# EAGLE board with_solar (EAGLE 9.4.2)
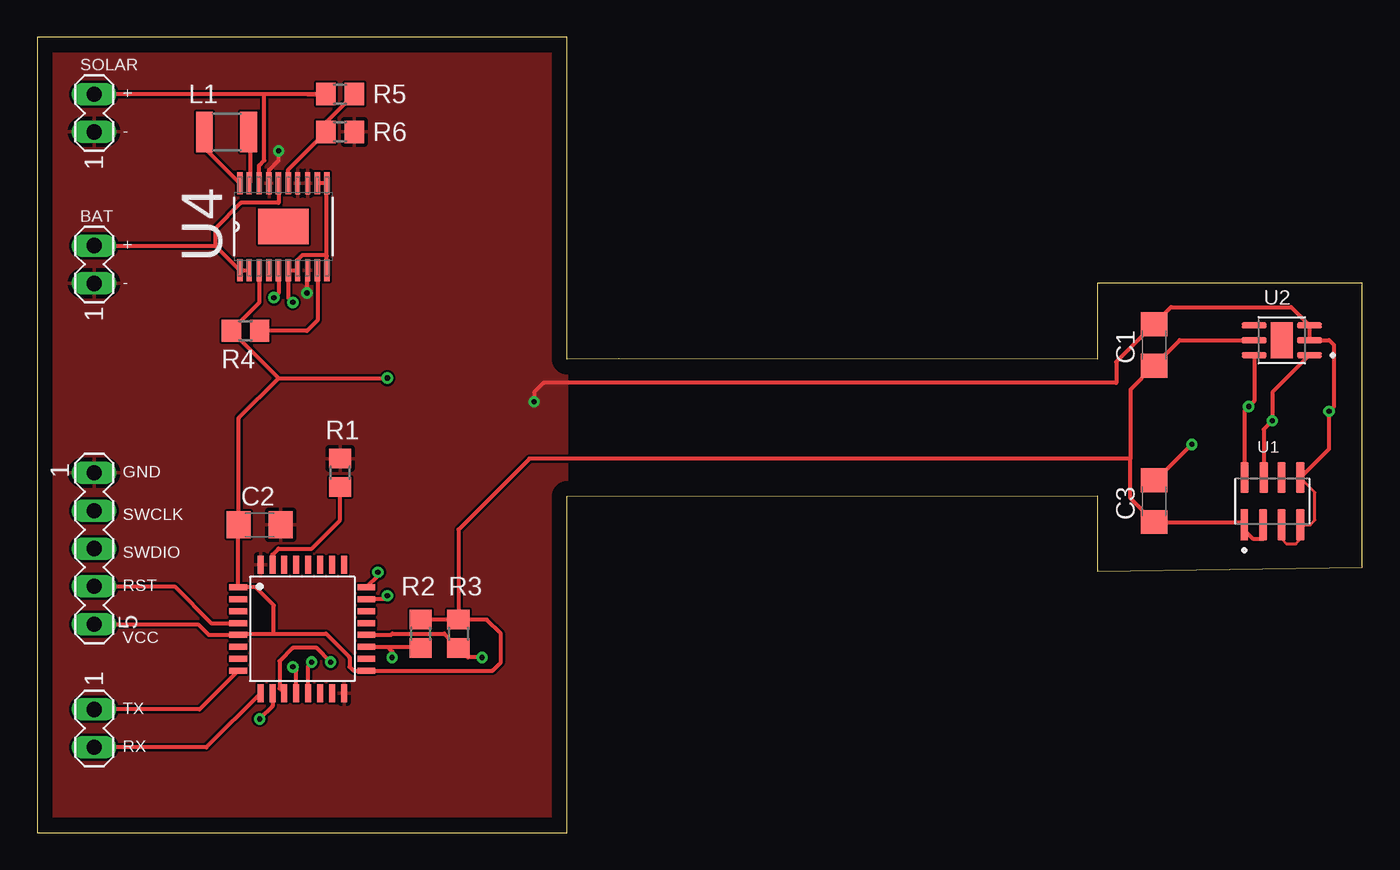
[diagram p0: board, top side]
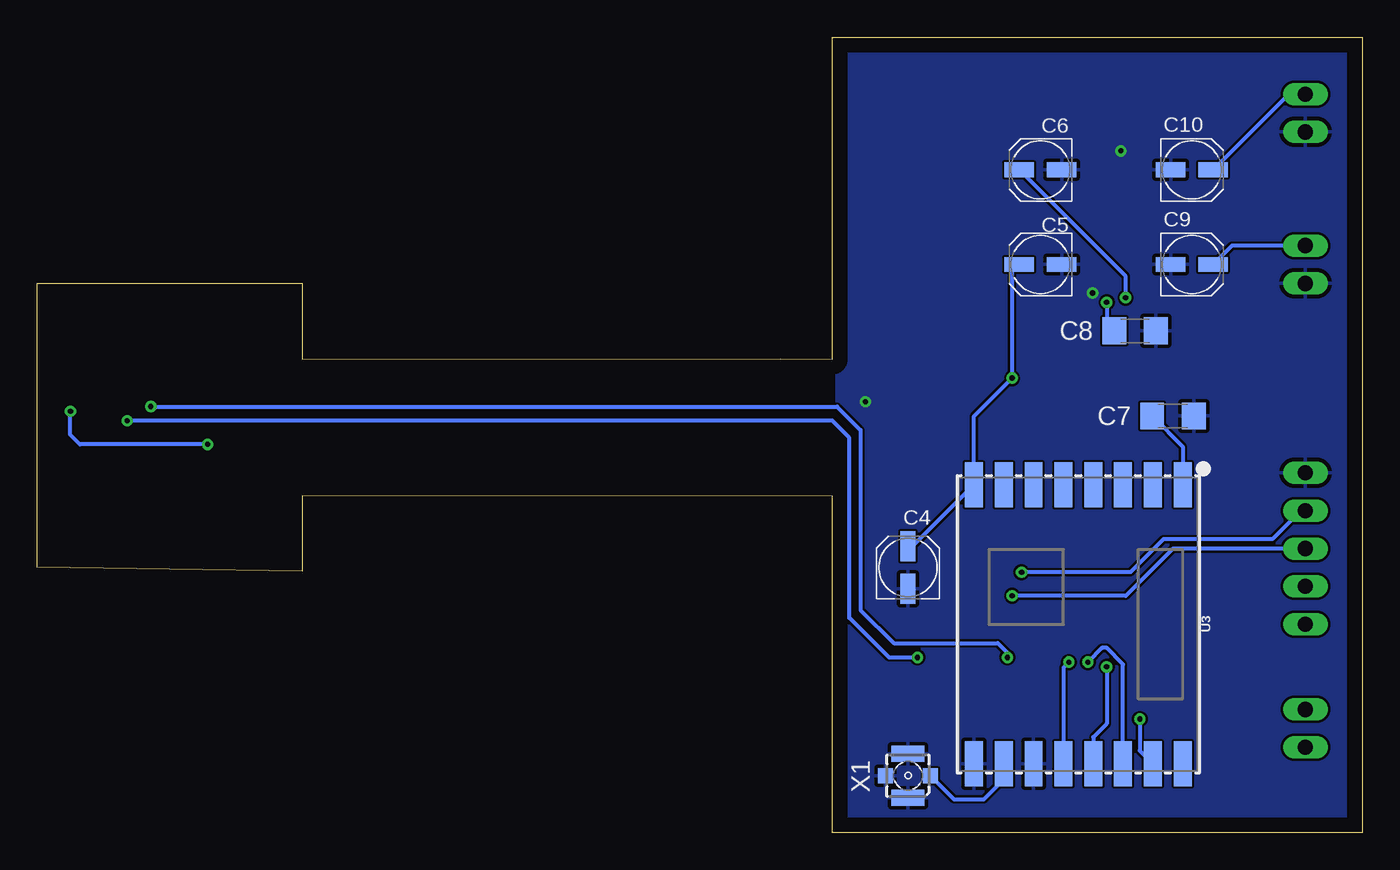
[diagram p1: board, bottom side, seen from below]

Size 88.9 x 53.34 mm. Coordinates in mm from the lower left corner, seen from the top.
Outline: 0,0 35.56,0 35.56,22.54 71.12,22.61 71.12,17.53 88.9,17.78 88.9,36.83 71.12,36.83 71.12,31.75 39.03,31.77 35.56,31.75 35.56,53.34 0,53.34 0,0
Copper layers (1*16): Top 0.035mm / dielectric 1.5mm / Bottom 0.035mm
Design rules "default": minimum track width 6mil, minimum drill 0.35mm, track to track 6mil, track to pad 6mil, pad to pad 6mil, via to via 6mil, smd to smd 6mil, copper to edge 40mil, drill to drill 6mil, minimum pad ring 10mil, minimum via ring 8mil, stop-mask expansion 4mil, vias tented up to drill 0mil, thermal gap 10mil

## Footprints (pad centres in the part's own frame; a part is rotated, then mirrored left to right if it is on the bottom)
C1206 = smd 1.6 x 1.8: 1 -1.4,0; 2 1.4,0
UD-4X5,8_NICHICON = smd 2 x 1: + 1.425,0; - -1.425,0
R1210 = smd 1.12 x 2.7: 1 -1.49,0; 2 1.49,0
R0805 = smd 1.3 x 1.5: 1 -0.95,0; 2 0.95,0
LQFP32-7X7 = smd 1.2 x 0.4: 1 -4.3,2.8; 2 -4.3,2; 3 -4.3,1.2; 4 -4.3,0.4; 5 -4.3,-0.4; 6 -4.3,-1.2; 7 -4.3,-2; 8 -4.3,-2.8; 17 4.3,-2.8; 18 4.3,-2; 19 4.3,-1.2; 20 4.3,-0.4; 21 4.3,0.4; 22 4.3,1.2; 23 4.3,2; 24 4.3,2.8 | smd 0.4 x 1.2: 9 -2.8,-4.3; 10 -2,-4.3; 11 -1.2,-4.3; 12 -0.4,-4.3; 13 0.4,-4.3; 14 1.2,-4.3; 15 2,-4.3; 16 2.8,-4.3; 25 2.8,4.3; 26 2,4.3; 27 1.2,4.3; 28 0.4,4.3; 29 -0.4,4.3; 30 -1.2,4.3; 31 -2,4.3; 32 -2.8,4.3
MA05-1 = drill 1.016 long: 1 -5.08,0; 2 -2.54,0; 3 0,0; 4 2.54,0; 5 5.08,0
MA02-1 = drill 1.016 long: 1 -2.54,0; 2 0,0
SON125P300X500X100-8N = smd 2.072 x 0.53: 1 -1.581,1.875; 2 -1.581,0.625; 3 -1.581,-0.625; 4 -1.581,-1.875; 5 1.581,-1.875; 6 1.581,-0.625; 7 1.581,0.574; 8 1.581,1.875
SON100P300X300X80-7N = smd 1.698 x 0.42: 1 -1.854,1; 2 -1.854,0; 3 -1.854,-1; 4 1.854,-1; 5 1.854,0; 6 1.854,1 | smd 1.5 x 2.4: 7 0,0
RFM69W-XXXS2 = smd 3 x 1.2: 1 -9.35,7; 2 -9.35,5; 3 -9.35,3; 4 -9.35,1; 5 -9.35,-1; 6 -9.35,-3; 7 -9.35,-5; 8 -9.35,-7; 9 9.35,-7; 10 9.35,-5; 11 9.35,-3; 12 9.35,-1; 13 9.35,1; 14 9.35,3; 15 9.35,5; 16 9.35,7
LTC3106 = smd 1.473 x 0.356: 1 -2.921,2.921; 2 -2.921,2.286; 3 -2.921,1.626; 4 -2.921,0.965; 5 -2.921,0.33; 6 -2.921,-0.33; 7 -2.921,-0.965; 8 -2.921,-1.626; 9 -2.921,-2.286; 10 -2.921,-2.921; 11 2.921,-2.921; 12 2.921,-2.286; 13 2.921,-1.626; 14 2.921,-0.965; 15 2.921,-0.33; 16 2.921,0.33; 17 2.921,0.965; 18 2.921,1.626; 19 2.921,2.286; 20 2.921,2.921 | smd 2.388 x 3.404: 21 0,0
734120110 = smd 1 x 1: 1 0,-1.5; S@1 0,1.5 | smd 1.05 x 2.2: S@2 -1.475,0; S@3 1.475,0

## Placement (x,y rotation side)
C1  100n  [C1206]  74.93,32.7 90 top
C2  100n  [C1206]  14.92,20.64 0 top
C3  100n  [C1206]  74.93,22.23 90 top
C4  10u  [UD-4X5,8_NICHICON]  30.48,17.78 90 bottom
C5  47u  [UD-4X5,8_NICHICON]  21.59,38.1 180 bottom
C6  2,2u  [UD-4X5,8_NICHICON]  21.59,44.45 180 bottom
C7  100n  [C1206]  12.7,27.94 0 bottom
C8  100n  [C1206]  15.24,33.66 0 bottom
C9  47u  [UD-4X5,8_NICHICON]  11.43,38.1 0 bottom
C10  47u  [UD-4X5,8_NICHICON]  11.43,44.45 0 bottom
L1  10u  [R1210]  12.7,46.99 0 top
R1  10k  [R0805]  20.32,24.13 90 top
R2  10k  [R0805]  25.72,13.34 90 top
R3  10k  [R0805]  28.26,13.34 90 top
R4  1M  [R0805]  13.97,33.66 180 top
R5  2M  [R0805]  20.32,49.53 180 top
R6  365k  [R0805]  20.32,46.99 180 top
STM32L031K6_1  STM32L031K6  [LQFP32-7X7]  17.78,13.65 0 top
SV1  PROG  [MA05-1]  3.81,19.05 270 top
SV2  BAT  [MA02-1]  3.81,49.53 90 top
SV3  UART  [MA02-1]  3.81,5.71 270 top
SV4  SOLAR  [MA02-1]  3.81,39.37 90 top
U1  MS560702BA03-50  [SON125P300X500X100-8N]  82.87,22.23 90 top
U2  HDC2080DMBR  [SON100P300X300X80-7N]  83.5,33.02 180 top
U3  RFM69HW  [RFM69W-XXXS2]  19.05,13.97 270 bottom
U4  LTC3106  [LTC3106]  16.51,40.64 90 top
X1  734120110  [734120110]  30.48,3.81 90 bottom

## Library data of the parts
C1-C10 = rcl; SPICEPREFIX: C
L1 STM32L031K6_1 SV2-SV4 = dp
R1-R6 = rcl; SPICEPREFIX: R
SV1 = con-lstb; OC_FARNELL: unknown; OC_NEWARK: unknown
U1 = MS560702BA03-50; AVAILABILITY: Unavailable; COMMENT: MS560702BA03-50; DESCRIPTION: MS5607-02BA03 Series 3 V 1 to 120 kPa Absolute Barometric Pressure Sensor; EU_ROHS_COMPLIANCE: Compliant; MF: TE Connectivity; MP: MS560702BA03-50; PACKAGE: SMD-8 TE Connectivity; PRICE: None; TE_PURCHASE_URL: https://www.te.com/usa-en/product-MS560702BA03-50.html?te_bu=Cor&te_type=disp&te_campaign=seda_glo_cor-seda-global-disp-prtnr-fy19-seda-model-bom-cta_sma-317_1&elqCampaignId=32493
U2 = HDC2080DMBR2; AVAILABILITY: Unavailable; DESCRIPTION: Board Mount Humidity Sensors Low Power Humidity and Temperature Digital Sensor 6-WSON -40 to 85.; MF: Texas Instruments; MP: HDC2080DMBR; PACKAGE: WDFN-6 Texas Instruments; PRICE: None
U3 = SparkFun-RF
U4 = LTC3106
X1 = con-coax

## Nets
BAT_IN: C9.+ SV4.2 U4.1 U4.2 U4.16
GND: C1.2 C2.2 C3.2 C4.- C5.- C6.- C7.2 C8.2 C9.- C10.- R1.2 R6.1 STM32L031K6_1.16 STM32L031K6_1.32 SV1.1 SV2.1 SV4.1 U1.3 U1.4 U1.5 U2.2 U2.3 U3.9 U3.11 U4.8 U4.13 U4.14 U4.17 X1.S@1 X1.S@2 X1.S@3
I2C_SCL: R2.1 STM32L031K6_1.19 U1.8 U2.6
I2C_SDA: R3.1 STM32L031K6_1.20 U1.7 U2.1
N$1: R1.1 STM32L031K6_1.31
N$2: U3.10 X1.1
N$3: L1.1 U4.20
N$4: L1.2 U4.19
N$5: C6.+ U4.5
N$6: R4.1 U4.9
N$7: R5.1 R6.2 U4.15
N$10: C7.1 U3.1
NRST: STM32L031K6_1.4 SV1.4
PWR_VCC: C8.1 U4.6 U4.7 U4.10 U4.11 U4.12
SOLAR_IN: C10.+ R5.2 SV2.2 U4.18
SPI_MISO: STM32L031K6_1.12 U3.13
SPI_MOSI: STM32L031K6_1.13 U3.14
SPI_NSS: STM32L031K6_1.10 U3.15
SPI_SCK: STM32L031K6_1.11 U3.12
SWCLK: STM32L031K6_1.24 SV1.2
SWDIO: STM32L031K6_1.23 SV1.3
UART_RX: STM32L031K6_1.9 SV3.2
UART_TX: STM32L031K6_1.8 SV3.1
VCC: C1.1 C2.1 C3.1 C4.+ C5.+ R2.2 R3.2 R4.2 STM32L031K6_1.1 STM32L031K6_1.5 STM32L031K6_1.17 SV1.5 U1.1 U1.2 U2.5 U3.8 U4.3

## Tracks (layer width: path | path; a pad name or v marks a point on that pad's centre or on a via)
BAT_IN
  Top 0.254: U4.16 16.19,43.55 16.19,42.23 13.65,42.23 11.94,40.51 11.94,39.37 | SV4.2 11.94,39.37 | 11.94,39.37 U4.1 U4.2
  Bottom 0.254: SV4.2 8.73,39.37 C9.+
GND  (via drill 0.35)
  Top 0.203: U1.3 83.49,19.7 83.82,19.37 84.45,19.37 84.74,19.66 U1.4 85.41,20.64 85.72,20.95 85.72,22.82 U1.5
  Top 0.254: v18.1,36.2 18.1,37.68 U4.8 | U4.17 15.54,44.44 16.19,45.09 v16.19,45.72 | U1.5 86.68,25.74 v86.68,28.26 87,28.57 87,32.7 86.68,33.02 U2.2 U2.3 84.14,35.24 76.07,35.24 C1.2 72.39,31.56 72.39,30.16 33.97,30.16 33.34,29.53 v33.34,28.89 | C3.2 75.06,23.62 v77.47,26.04
  Bottom 0.254: v77.47,26.04 86.04,26.04 86.68,26.67 v86.68,28.26
  pour Top: 0.32,53.02 0.32,0 35.56,0 35.56,53.02
  pour Bottom: 0.32,53.34 0.32,0 35.24,0 35.24,53.34
I2C_SCL  (via drill 0.35)
  Top 0.254: 81.63,32 U2.6 81.65,28.94 v81.28,28.57 80.99,28.29 U1.8 | STM32L031K6_1.19 23.5,12.45 | 23.5,12.45 25.65,12.45 R2.1 | v23.81,11.75 23.81,12.13 23.5,12.45
  Bottom 0.254: v23.81,11.75 23.81,12.06 24.45,12.7 31.43,12.7 33.66,14.92 33.66,26.99 35.24,28.57 v81.28,28.57
I2C_SDA  (via drill 0.35)
  Top 0.254: STM32L031K6_1.20 23.73,13.25 23.81,13.34 27.31,13.34 R3.1 28.89,11.75 v29.84,11.75 | U2.1 82.87,29.53 v82.87,27.62 82.29,27.05 U1.7
  Bottom 0.254: v29.84,11.75 31.75,11.75 34.41,14.41 34.41,26.47 35.56,27.62 v82.87,27.62
N$1
  Top 0.254: STM32L031K6_1.31 15.78,18.64 16.19,19.05 18.41,19.05 20.32,20.95 R1.1
N$2
  Bottom 0.254: X1.1 27.39,2.22 25.4,2.22 24.05,3.57 U3.10
N$3
  Top 0.254: U4.20 11.21,45.94 L1.1
N$4
  Top 0.254: U4.19 14.29,43.62 14.29,46.89 L1.2
N$5  (via drill 0.35)
  Top 0.254: U4.5 16.18,36.18 v15.88,35.88
  Bottom 0.254: v15.88,35.88 15.88,37.31 C6.+
N$6
  Top 0.254: U4.9 18.8,34.35 18.1,33.66 R4.1
N$7
  Top 0.254: U4.15 16.84,44.46 R6.2 19.37,47.63 | 19.37,47.63 R5.1 | R6.2 19.37,47.63
N$10
  Bottom 0.254: C7.1 12.05,25.89 U3.1
NRST
  Top 0.254: SV1.4 9.21,16.51 11.66,14.05 STM32L031K6_1.4
PWR_VCC  (via drill 0.35)
  Top 0.254: U4.12 U4.11 U4.10 19.43,38.67 19.37,38.73 17.78,38.73 17.48,38.43 U4.7 U4.6 16.84,35.87 v17.14,35.56
  Bottom 0.254: v17.14,35.56 17.14,34.16 C8.1
SOLAR_IN
  Top 0.254: 18.1,49.53 R5.2 15.24,49.53 | 15.24,49.53 SV2.2 | U4.18 14.88,44.73 15.24,45.09 15.24,49.53
  Bottom 0.254: SV2.2 4.92,49.53 C10.+
SPI_MISO  (via drill 0.35)
  Top 0.254: STM32L031K6_1.12 17.38,10.88 v17.14,11.11
  Bottom 0.254: v17.14,11.11 17.14,7.3 18.05,6.4 U3.13
SPI_MOSI  (via drill 0.35)
  Top 0.254: STM32L031K6_1.13 18.18,11.2 v18.41,11.43
  Bottom 0.254: U3.14 16.05,11.29 17.14,12.38 17.46,12.38 v18.41,11.43
SPI_NSS  (via drill 0.35)
  Top 0.254: STM32L031K6_1.10 15.78,8.48 v14.92,7.62
  Bottom 0.254: v14.92,7.62 14.92,5.49 U3.15
SPI_SCK  (via drill 0.35)
  Top 0.254: v19.68,11.43 18.73,12.38 17.14,12.38 16.26,11.5 16.26,9.67 STM32L031K6_1.11
  Bottom 0.254: v19.68,11.43 20.05,11.06 U3.12
SWCLK  (via drill 0.35)
  Top 0.254: v22.86,17.46 22.86,17.23 STM32L031K6_1.24
  Bottom 0.254: SV1.2 4.13,21.59 6.03,19.68 13.34,19.68 15.56,17.46 v22.86,17.46
SWDIO  (via drill 0.35)
  Top 0.254: v23.5,15.88 23.27,15.65 STM32L031K6_1.23
  Bottom 0.254: SV1.3 12.7,19.05 15.88,15.88 v23.5,15.88
UART_RX
  Top 0.254: STM32L031K6_1.9 11.34,5.71 SV3.2
UART_TX
  Top 0.254: STM32L031K6_1.8 10.88,8.26 SV3.1
VCC  (via drill 0.35)
  Top 0.254: SV1.5 10.79,13.97 11.51,13.25 STM32L031K6_1.5 13.56,13.34 15.88,13.34 | R3.2 30.16,14.29 31.11,13.33 31.11,11.43 30.54,10.85 STM32L031K6_1.17 21.21,10.85 20.95,11.11 20.95,11.75 19.37,13.34 15.88,13.34 | R3.2 R2.2 | 15.88,13.34 15.88,15.24 14.66,16.45 STM32L031K6_1.1 13.48,20.59 C2.1 13.52,27.81 16.19,30.48 | U4.3 14.88,35.52 R4.2 16.19,30.48 | 16.19,30.48 16.2,30.48 v23.5,30.48 | U1.2 82.23,19.68 81.6,19.68 80.99,20.29 U1.1 80.81,20.82 C3.1 73.34,22.41 73.34,25.08 | U2.5 76.65,33.02 C1.1 73.34,29.71 73.34,25.08 | 73.34,25.08 33.02,25.08 28.26,20.32 R3.2
  Bottom 0.254: C4.+ 30.16,19.2 U3.8 26.05,27.93 v23.5,30.48 23.5,37.62 C5.+

## Text on the board
tNames: SOLAR | + | - | BAT | + | - | GND | SWCLK | SWDIO | RST | VCC | TX | RX